# Altium PCB DDSShieldBoard.PcbDoc
Units mil, origin at the board's own origin, x right, y up, seen from the top; angles counter-clockwise.
Board outline 6000 x 4000 mil, 2 copper layers (Top Layer, Bottom Layer); 18 components, 37 nets, 91 pads, 4 vias.
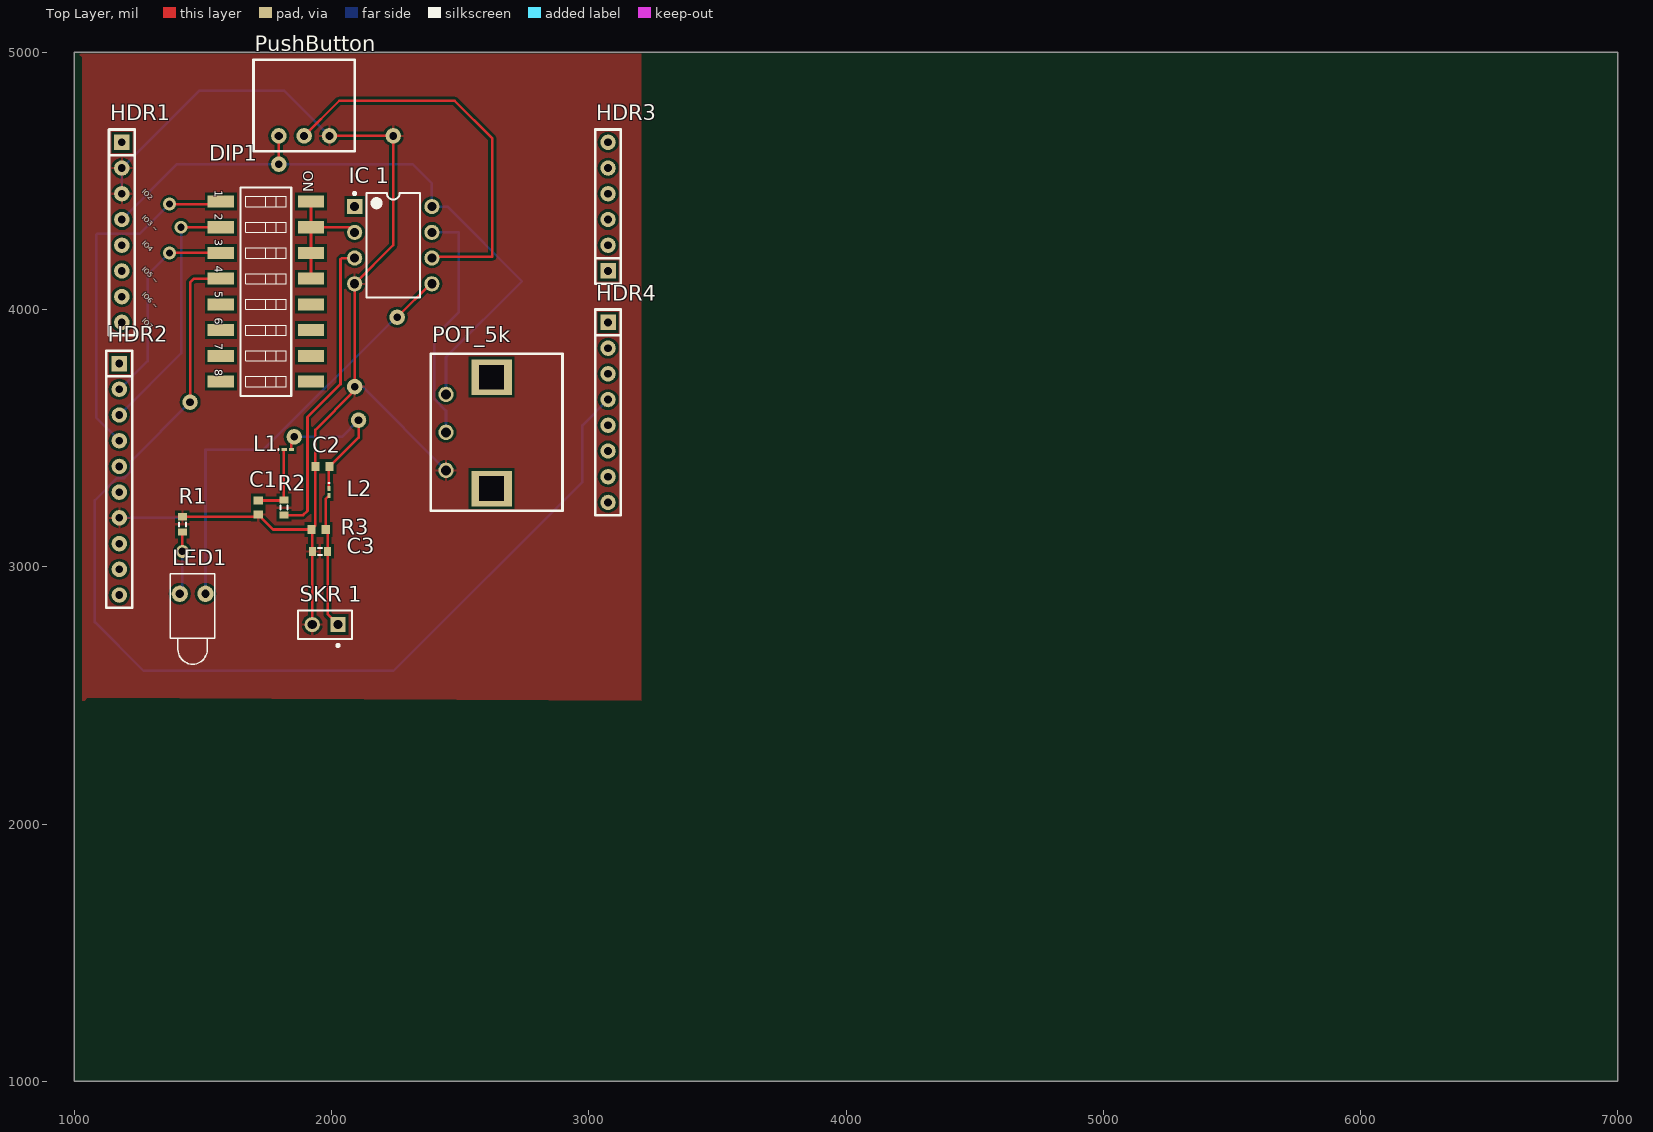
[diagram p0: Top Layer view]
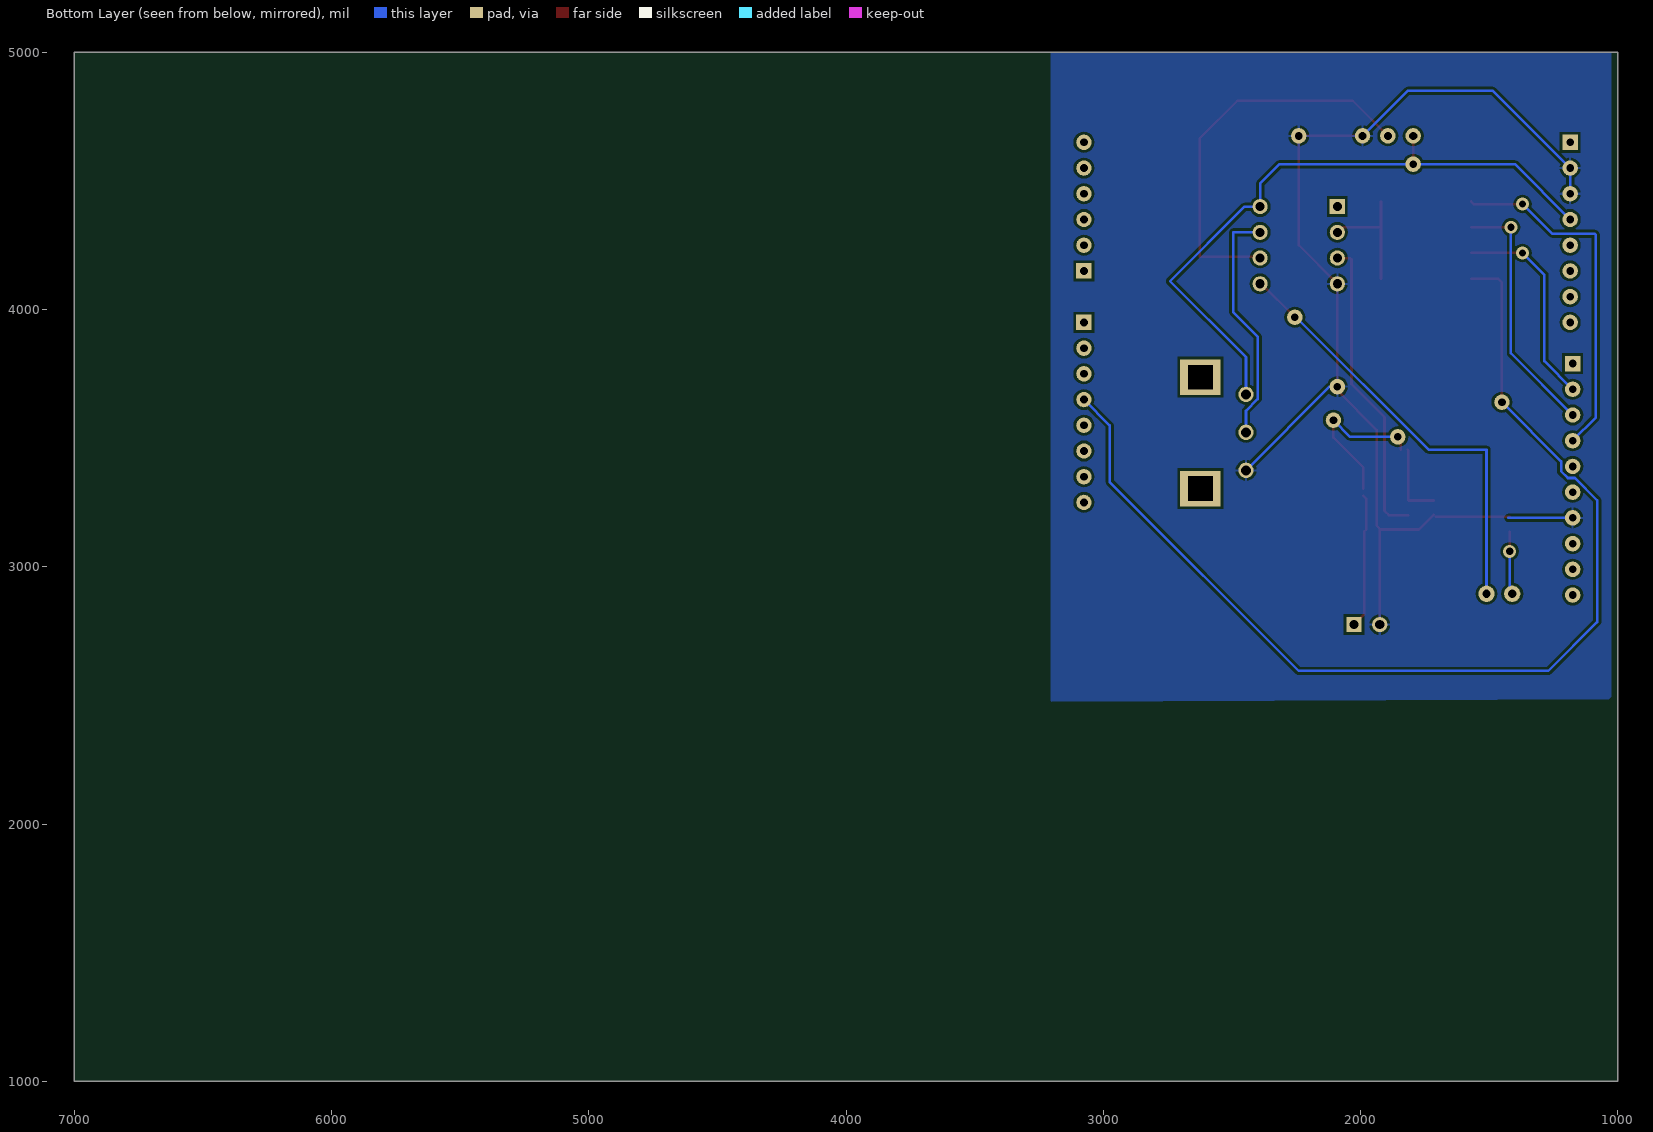
[diagram p1: Bottom Layer view, seen from below]

## Layer stack, top to bottom
Top Solder: solder mask 0.4, Solder Resist, Dk 3.5
Top Layer: signal copper 1.4
Dielectric 1: dielectric 12.6, FR-4, Dk 4.8
Bottom Layer: signal copper 1.4
Bottom Solder: solder mask 0.4, Solder Resist, Dk 3.5

## Board outline
1000,1000 7000,1000 7000,5000 1000,5000

## Design rules (kind name [scope] priority, off if disabled: settings)
Clearance [All] p1: gap=10
PolygonConnect [All] p1: connectstyle=Relief reliefconductorwidth=10 reliefentries=4 polygonreliefangle="90 Angle" airgapwidth=10
RoutingVias [All] p1: holewidth=28 width=50 viastyle="Through Hole" minholewidth=28 minwidth=50 maxholewidth=28 maxwidth=50
SolderMaskExpansion [All] p1: expansion=4
Width [All] p1: maxlimit=10 minlimit=10 preferedwidth=10
30 further rules are at their usual default settings.

## Components (designator, comment, footprint, x,y, rotation, side; value= is the part's Value field where it differs from the comment)
C1 "Cap Semi" 1608[0603] 1715,3230 r90 top
C2 "Cap Semi" 1608[0603] 1965,3390 r0 top
C3 "Cap Semi" 1608[0603] 1950,3145 r0 top
DIP1 "SW DIP-8" DIP_SW_8WAY_SMD 1745,4070 r270 top
HDR1 "POWER_UNO" "Header 8x1 8.5mm" 1185,4650 r270 top
HDR2 "IOH" "Header 10x1 8.5mm" 1175,3790 r270 top
HDR3 "AD" "Header 6x1 8.5mm" 3075,4150 r90 top
HDR4 "IOL" "Header 8x1 8.5mm" 3075,3950 r270 top
"IC 1" "ATtiny85" 8P3 2240,4250 r0 top
L1 "Inductor" 0603 1830,3455 r0 top
L2 "Inductor" 0603 1990,3290 r270 top
LED1 "LED1" LED-1 1460,2895 r270 top
POT_5k "Component_1" PCBComponent_1 2445,3670 r270 top
PushButton "PushButton" PushButtonFrame 1795,4675 r0 top
R1 "" J1-0603 1420,3165 r270 top
R2 "Res3" J1-0603 1815,3230 r270 top
R3 "Res3" J1-0603 1955,3060 r0 top
"SKR 1" "Speaker" PIN2 2025,2775 r180 top

## Footprints (in the part's own frame and the unit in brackets; to place one, negate y for a bottom-side part, rotate by r counter-clockwise, add the part's x,y. Pads: shape width x height; smd on the part's side, far side on the other; paste and mask are expansions set on the pad)
8P3 [mm] "DIP, 8-Leads, Row Spacing 7.62mm, Pitch 2.54mm, Body 9.59x6.61mm"
  rect 1.5x1.5 hole 0.9: 1(-3.81,3.81)
  round 1.5 hole 0.9: 2(-3.81,1.27) 3(-3.81,-1.27) 4(-3.81,-3.81) 5(3.81,-3.81) 6(3.81,-1.27) 7(3.81,1.27) 8(3.81,3.81)
  silkscreen extent -3.93,-5.15 2.65,5.23, body extent -3.6,-5.15 3.6,5.15, height 5.34
0603 [mm] "Chip Inductor, Body 0.6x0.3mm, IPC High Density"
  rect 0.5x0.3 smd: 1(-0.35,0) 2(0.35,0)
  silkscreen extent -0.9,-0.05 -0.9,0.05, body extent -0.33,-0.18 0.33,0.18, height 0.55
1608[0603] [mm] "Chip Capacitor, Body 1.6x0.8mm, IPC High Density"
  rect 0.8x0.9 smd: 1(-0.7,0) 2(0.7,0)
  body extent -0.87,-0.48 0.87,0.48, height 1.3
DIP_SW_8WAY_SMD [mm] "DIP Switch; 16 Leads"
  rect 1.2x2.6 smd: 1(-8.89,-4.45) 2(-6.35,-4.45) 3(-3.81,-4.45) 4(-1.27,-4.45) 5(1.27,-4.45) 6(3.81,-4.45) 7(6.35,-4.45) 8(8.89,-4.45) 9(8.89,4.45) 10(6.35,4.45) 11(3.81,4.45) 12(1.27,4.45) 13(-1.27,4.45) 14(-3.81,4.45) 15(-6.35,4.45) 16(-8.89,4.45)
  silkscreen extent -10.29,-2.5 10.31,2.5
"Header 6x1 8.5mm" [mil] "Stackable 6 pin header"
  rect 60x60 hole 30: 1(0,0)
  round 60 hole 30: 2(100,0) 3(200,0) 4(300,0) 5(400,0) 6(500,0)
  silkscreen extent -50,-50 550,50, body extent -50,-50 550,50, height 335
"Header 8x1 8.5mm" [mil] "Stackable 8 pin header"
  rect 60x60 hole 30: 1(0,0)
  round 60 hole 30: 2(100,0) 3(200,0) 4(300,0) 5(400,0) 6(500,0) 7(600,0) 8(700,0)
  silkscreen extent -50,-50 750,50, body extent -50,-50 750,50, height 335
"Header 10x1 8.5mm" [mil] "Stackable 10 pin header"
  rect 60x60 hole 30: 1(0,0)
  round 60 hole 30: 2(100,0) 3(200,0) 4(300,0) 5(400,0) 6(500,0) 7(600,0) 8(700,0) 9(800,0) 10(900,0)
  silkscreen extent -50,-50 950,50, body extent -50,-50 950,50, height 335
J1-0603 [mm] "Chip Resistor, Body 1.6x0.8mm, IPC High Density"
  rect 0.7x0.9 smd: 1(-0.75,0) 2(0.75,0)
  silkscreen extent -0.2,-0.35 0.2,0.35, body extent -0.85,-0.48 0.85,0.48, height 0.9
LED-1 [mm] "LED; 2 Leads"
  round 1.6 hole 0.8: 1(0,1.27) 2(0,-1.27)
  silkscreen extent -2,-2.2 6.95,2.2
PCBComponent_1 [mm]
  round 1.524 hole 1: Pot_Gnd(7.5,0) Pot_High(0,0) Pot_Out(3.75,0)
  rect 3.5x4 hole 2.4 square: Solder_Pad_1(-1.7,4.5) Solder_Pad_2(9.3,4.5)
  silkscreen extent -4,-1.5 11.5,11.5
PIN2 [mm] "Photosensitive Diode; 2 Leads"
  rect 1.5x1.5 hole 0.9: 1(0,0)
  round 1.5 hole 0.9: 2(2.54,0)
  silkscreen extent -1.4,-1.4 3.94,2.17
PushButtonFrame [mil]
  round 60 hole 31.5: 0(0,0) 1(98.43,0) 2(196.85,0)
  silkscreen extent -98,-59 295,295

## Part data
C1 C2 C3: "Capacitor (Semiconductor SIM Model)"
DIP1: "DIP Switch, 8 Position, SPST"
"IC 1": library part ATtiny85-20PU, "Low Power tinyAVR® 8-Bit Microcontroller, 8K Flash Memory, 20MHz, Industrial Temperature, 8-Lead PDIP, Pb-Free"
LED1: "Typical RED GaAs LED"
POT_5k: "5k RES"
R1: library part Res3, "Resistor"
R2 R3: "Resistor"
"SKR 1": "Loudspeaker"

## Free pads (board coordinates)
  round 60 hole 30: 1(2255,3970) 2(2240,4675) 5(1795,4565) 8(1855,3505) 9(2090,3700) 10(2105,3570) 11(1450,3640)

## Via types
v1: diameter 50, hole 28, Top Layer to Bottom Layer, 4 vias

## Nets (pads, with @x,y where several pads share a name; then routed paths per layer and width w, separated by ;. In a path a pad name is that pad's centre, name@x,y a point inside that pad or via, vN(x,y) a via of type N, cw(c..) or ccw(c..) an arc to the next point about the centre after c; other vN are vias at no path point)
3V3: HDR1.5
AD0: HDR3.1
AD1: HDR3.2
AD2: HDR3.3
AD3: HDR3.4
AD4: HDR3.5
AD5: HDR3.6
AREF: HDR2.8
GND: "IC 1.4" "SKR 1.2" C1.1 C2.1 C3.1 HDR1.2 HDR1.3 HDR2.7 pad.2 pad.9 POT_5k.Pot_Gnd PushButton.2 R1.1 R3.1 | length 4640.3
  Top Layer w10: R1.1 C1.1@1707.09,3194.53 ; C1.1 1772.44,3145 C3.1 ; 1925,2775 1925,3059.53 R3.1 1925.47,3148.03 1937.44,3160 C2.1 1937.44,3532.44 2090,3685 pad.9 2090,4100 2240,4250 pad.2 PushButton.2
  Bottom Layer w10: HDR2.7 1425,3190 ; HDR1.3 HDR1.2 1485,4850 1816.85,4850 PushButton.2 ; pad.9 2119.72,3700 POT_5k.Pot_Gnd
IO0: HDR4.1
IO1: HDR4.2
IO2: HDR4.3
IO3: DIP1.4 HDR4.4 pad.11 | length 4269
  Top Layer w10: pad.11 1450,4105 1465,4120 DIP1.4
  Bottom Layer w10: pad.11@1460,3650 pad.11 1220,3410 1220,3371.36 1193.64,3345 1166.36,3345 1080,3258.64 1080,2785 1270,2595 2240,2595 2975,3330 2975,3550 HDR4.4
IO4: HDR4.5
IO5: HDR4.6
IO6: HDR4.7
IO7: HDR4.8
IO8: HDR2.1
IO9: DIP1.3 HDR2.2 | length 820.6
  Top Layer w10: v1(1370,4220) DIP1.3
  Bottom Layer w10: HDR2.2 1285,3800 1285,4135 v1(1370,4220) v1@1370,4230
IO10: DIP1.2 HDR2.3 | length 984.2
  Top Layer w10: v1(1415,4320) DIP1.2
  Bottom Layer w10: HDR2.3 1415,3830 v1(1415,4320)
IO11: DIP1.1 HDR2.4 | length 1375.9
  Top Layer w10: v1(1370,4410) 1559.8,4410 DIP1.1
  Bottom Layer w10: HDR2.4 1085,3580 1085,4290 1090,4295 1255,4295 v1(1370,4410)
IO12: HDR2.5
IO13: HDR2.6
IOREF: HDR1.7
NetC1_2: C1.2 L1.1 R2.1 | length 294
  Top Layer w10: C1.2 R2.1@1813.03,3257.56 ; R2.1 1815,3453.78 L1.1
NetC2_2: C2.2 L1.2 L2.1 pad.8 pad.10 | length 648.7
  Top Layer w10: L1.2 pad.8@1843.78,3498.78 ; L2.1 1990,3387.44 C2.2 2105,3502.44 pad.10
  Bottom Layer w10: pad.8 2040,3505 pad.10 pad.10@2115,3580
NetC3_2: "SKR 1.1" C3.2 L2.2 R3.2 | length 516.2
  Top Layer w10: C3.2 1977.56,3263.78 L2.2 ; C3.2@1984.53,3138.03 R3.2 1984.53,2815.47 2025,2775
NetDIP1_13: "IC 1.2" DIP1.13 DIP1.14 DIP1.15 DIP1.16 | length 478.1
  Top Layer w10: DIP1.13 DIP1.14 DIP1.15 ; DIP1.16 DIP1.15 ; 2090,4300 2070,4320 DIP1.15
"NetIC 1_3": "IC 1.3" R2.2 | length 1186.4
  Top Layer w10: R2.2 1889.53,3200.47 1906.69,3217.64 1906.69,3581.69 2035,3710 2035,4195 2040,4200 2090,4200
"NetIC 1_5": "IC 1.5" LED1.1 pad.1 | length 1712.2
  Top Layer w10: pad.1 2385,4100 2390,4100
  Bottom Layer w10: LED1.1 1510,3455 1735,3455 2250,3970 pad.1 pad.1@2260,3970
"NetIC 1_6": "IC 1.6" PushButton.1 | length 1545.9
  Top Layer w10: PushButton.1 2030,4811.57 2478.43,4811.57 2625,4665 2625,4205 2395,4205 2390,4200
"NetIC 1_7": "IC 1.7" POT_5k.Pot_Out | length 940.6
  Bottom Layer w10: 2390,4300 2495,4300 2495,3990 2400,3895 2400,3651.36 2445,3606.36 POT_5k.Pot_Out
NetLED1_2: LED1.2 R1.2 | length 230.5
  Top Layer w10: v1(1420,3060) R1.2
  Bottom Layer w10: LED1.2@1420,2905 v1(1420,3060)
RESET: HDR1.6
SCL: HDR2.10
SDA: HDR2.9
VCC: "IC 1.8" HDR1.4 pad.5 POT_5k.Pot_High PushButton.0 | length 2579.5
  Top Layer w10: pad.5@1795,4550 pad.5 PushButton.0 ; 2390,4400 2395,4405
  Bottom Layer w10: HDR1.4 1400,4565 pad.5 2315,4565 2390,4490 2390,4400 2450,4400 2740,4110 2445,3815 POT_5k.Pot_High
pads on no net: "IC 1.1" DIP1.5 DIP1.6 DIP1.7 DIP1.8 DIP1.9 DIP1.10 DIP1.11 DIP1.12 HDR1.1 HDR1.8 POT_5k.Solder_Pad_1 POT_5k.Solder_Pad_2

## Polygon pours and split planes (outlines as drawn)
GND on Top Layer "Mechanical 1-No Net" (solid, pour order 2): 3210,2480 3205,2485 3205,4995 1025,4995 1020,4990 1030,4980 1030,2480 1040,2480 1050,2490
GND on Bottom Layer "Mechanical 1-No Net" (solid, pour order 4): 3205,2475 3205,5000 1025,5000 1025,2495 1035,2485

## Silkscreen, mask and mechanical layers (free items; w line width, h text height)
Top Overlay:
  text "IO2" at 1262.07,4455 h20 r315
  text "IO3 ~" at 1262.07,4355 h20 r315
  text "IO4" at 1262.07,4255 h20 r315
  text "IO5 ~" at 1262.07,4155 h20 r315
  text "IO6 ~" at 1262.07,4055 h20 r315
  text "IO7" at 1262.07,3955 h20 r315
Mechanical 1:
  lines w10: 1025,4950 1025,5000 3205,5000 3215,4990 3215,2480 1035,2480 1025,2490 1025,4960

## Text inside footprints (layer, text, board x,y; h text height)
DIP1: Top Overlay "8" at 1546.89,3768.46 h31.5 r270; Top Overlay "7" at 1546.89,3868.46 h31.5 r270; Top Overlay "ON" at 1889.8,4540 h39.37 r270; Top Overlay "1" at 1546.89,4463.94 h31.5 r270; Top Overlay "2" at 1546.89,4372.4 h31.5 r270; Top Overlay "3" at 1546.89,4273.98 h31.5 r270; Top Overlay "4" at 1546.89,4170.63 h31.5 r270; Top Overlay "5" at 1546.89,4071.22 h31.5 r270; Top Overlay "6" at 1546.89,3968.86 h31.5 r270